# Altium PCB XBR403-01.PcbDoc
Units mil, origin at the board's own origin, x right, y up, seen from the top; angles counter-clockwise.
Board outline 1338.58 x 905.51 mil, 2 copper layers (Top Layer, Bottom Layer), stack 39.335 mil thick; 54 components, 31 nets, 143 pads, 97 vias.
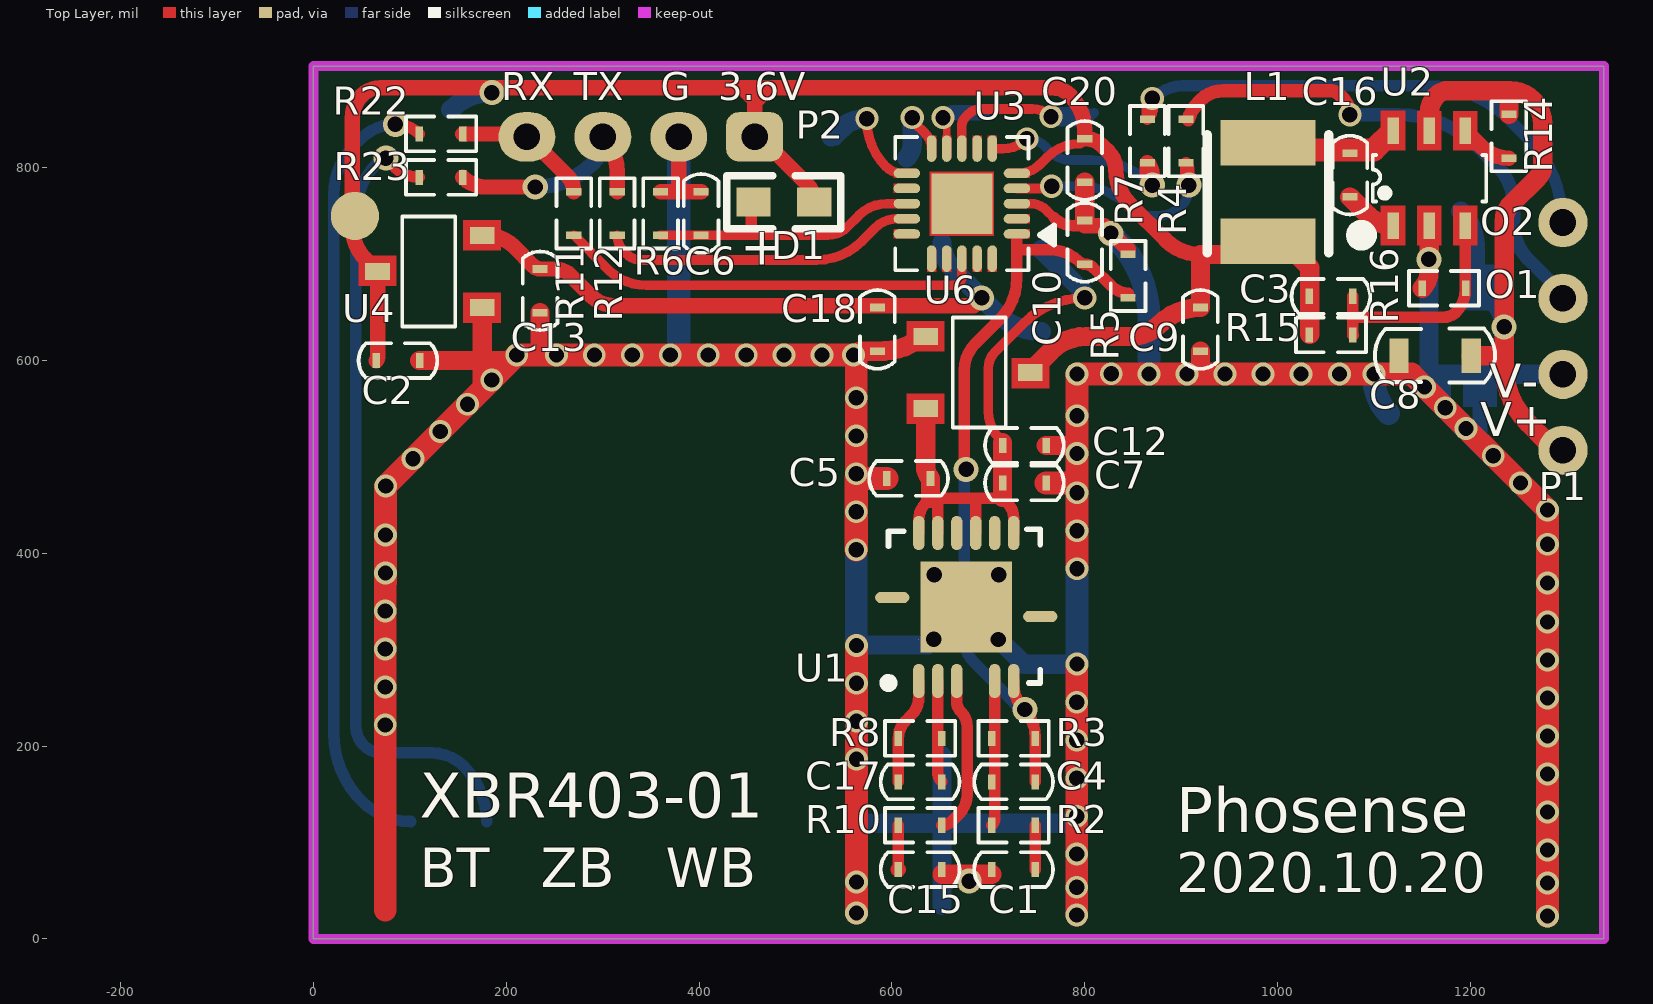
[diagram p0: Top Layer view]
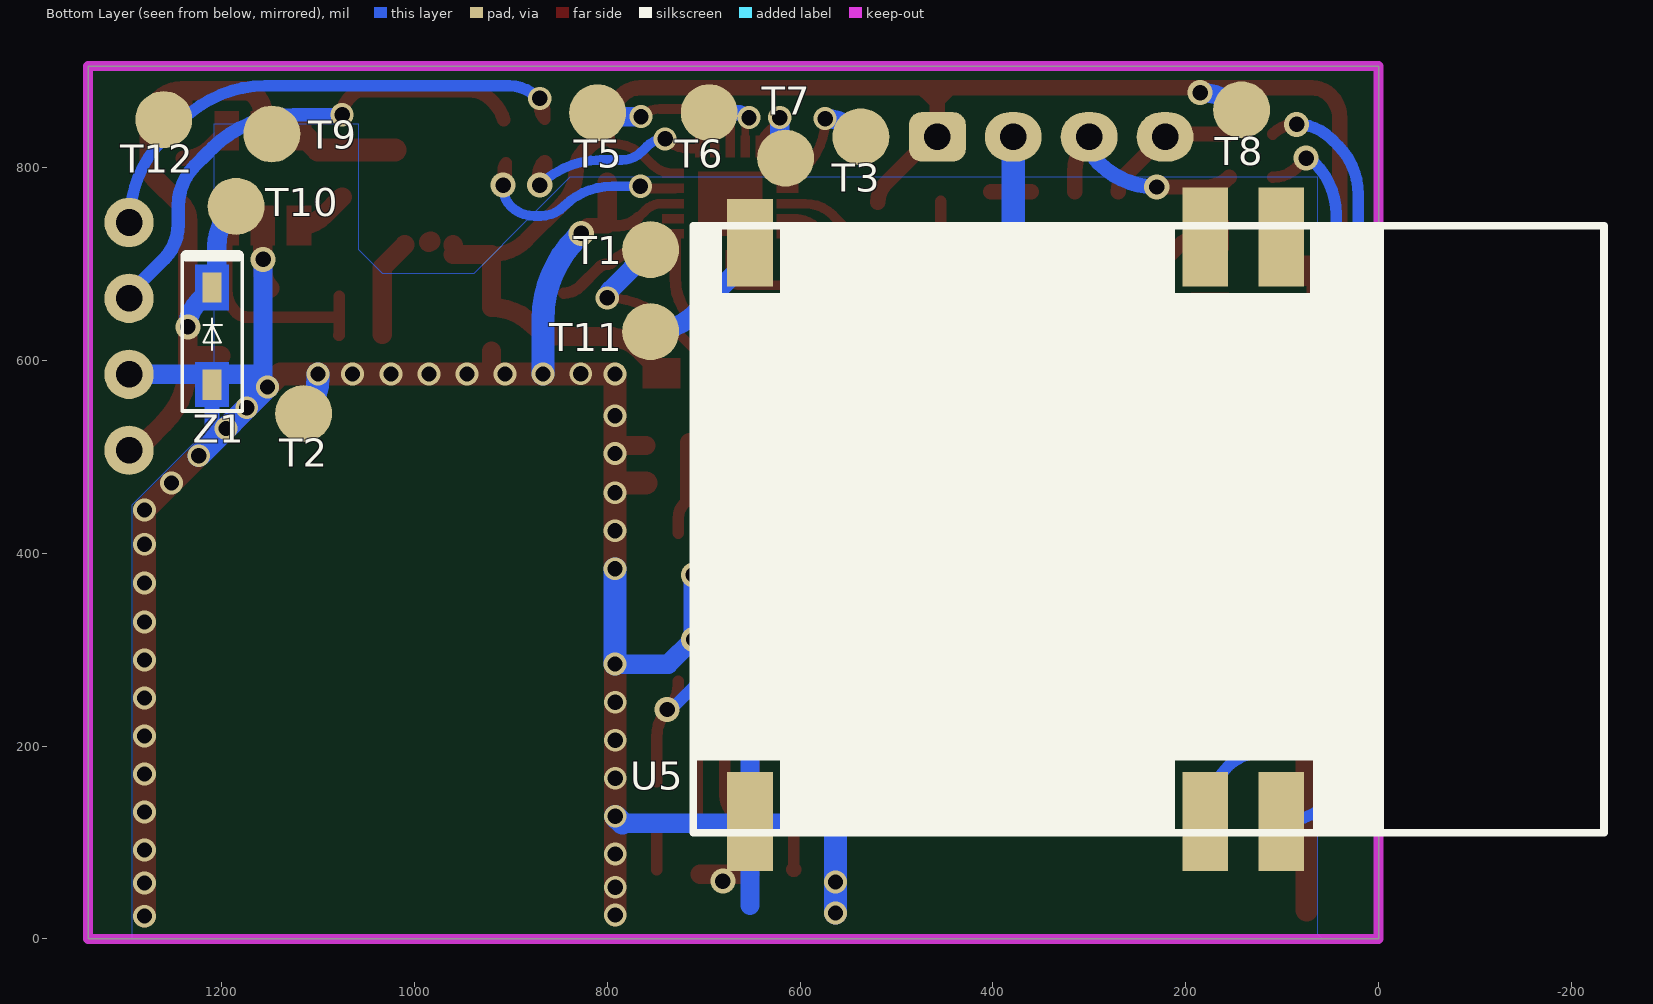
[diagram p1: Bottom Layer view, seen from below]

## Layer stack, top to bottom
Top Layer: signal copper 1.4
Dielectric: core 36.5354, FR-4, Dk 4.8
Bottom Layer: signal copper 1.4

## Board outline
0,0 1338.58,0 1338.58,905.51 0,905.51

## Design rules (kind name [scope] priority, off if disabled: settings)
Clearance [All] p0: scope1count=1 scope1_0_kind=Board scope1_0_value=Board scope2count=1 scope2_0_kind=Board scope2_0_value=Board commentlength=0 gap=10
Clearance [All] p1: gap=10
ComponentClearance [All] p0: scope1count=1 scope1_0_kind=Board scope1_0_value=Board scope2count=1 scope2_0_kind=Board scope2_0_value=Board commentlength=0 gap=10 collisioncheckmode=3
ComponentClearance [All] p1: gap=10 collisioncheckmode=3 verticalgap=10
DiffPairsRouting [All] p0: scope1count=1 scope1_0_kind=Board scope1_0_value=Board scope2count=1 scope2_0_kind=Board scope2_0_value=Board commentlength=0
FanoutControl Fanout_BGA [All] p0 off: scope1count=1 scope1_0_kind=Board scope1_0_value=Board scope2count=1 scope2_0_kind=Board scope2_0_value=Board commentlength=69 // Protel DXP Scope 1 Expression Was: IsBGA   Fanout_BGA (Default Rule)
FanoutControl Fanout_LCC [All] p0 off: scope1count=1 scope1_0_kind=Board scope1_0_value=Board scope2count=1 scope2_0_kind=Board scope2_0_value=Board commentlength=69 // Protel DXP Scope 1 Expression Was: IsLCC   Fanout_LCC (Default Rule)
FanoutControl Fanout_SOIC [All] p0 off: scope1count=1 scope1_0_kind=Board scope1_0_value=Board scope2count=1 scope2_0_kind=Board scope2_0_value=Board commentlength=71 // Protel DXP Scope 1 Expression Was: IsSOIC   Fanout_SOIC (Default Rule)
FanoutControl Fanout_Small [All] p0 off: scope1count=1 scope1_0_kind=Board scope1_0_value=Board scope2count=1 scope2_0_kind=Board scope2_0_value=Board commentlength=84 // Protel DXP Scope 1 Expression Was: (CompPinCount < 5)   Fanout_Small (Default Rule)
FanoutControl Fanout_Default [All] p0: scope1count=1 scope1_0_kind=Board scope1_0_value=Board scope2count=1 scope2_0_kind=Board scope2_0_value=Board commentlength=30 // Fanout_Default (Default Rule)
Height [All] p0: scope1count=1 scope1_0_kind=Board scope1_0_value=Board scope2count=1 scope2_0_kind=Board scope2_0_value=Board commentlength=0
HoleSize [All] p0: scope1count=1 scope1_0_kind=Board scope1_0_value=Board scope2count=1 scope2_0_kind=Board scope2_0_value=Board commentlength=0 absolutevalues=TRUE maxlimit=100 minlimit=1 maxpercent=80.000 minpercent=20.000
LayerPairs [All] p0: scope1count=1 scope1_0_kind=Board scope1_0_value=Board scope2count=1 scope2_0_kind=Board scope2_0_value=Board commentlength=0 enforce=TRUE
PasteMaskExpansion [All] p0: scope1count=1 scope1_0_kind=Board scope1_0_value=Board scope2count=1 scope2_0_kind=Board scope2_0_value=Board commentlength=0 expansion=0
PlaneClearance [All] p0: scope1count=1 scope1_0_kind=Board scope1_0_value=Board scope2count=1 scope2_0_kind=Board scope2_0_value=Board commentlength=0 clearance=20
PlaneConnect [All] p0: scope1count=1 scope1_0_kind=Board scope1_0_value=Board scope2count=1 scope2_0_kind=Board scope2_0_value=Board commentlength=0 planeconnectstyle=Relief reliefexpansion=20 reliefentries=4 reliefconductorwidth=10 reliefairgap=10
PolygonConnect [All] p0: scope1count=1 scope1_0_kind=Board scope1_0_value=Board scope2count=1 scope2_0_kind=Board scope2_0_value=Board commentlength=0 connectstyle=Direct reliefconductorwidth=10 reliefentries=4 polygonreliefangle="90 Angle"
PolygonConnect [All] p1: connectstyle=Direct reliefconductorwidth=10 reliefentries=4 polygonreliefangle="90 Angle"
RoutingCorners [All] p0: scope1count=1 scope1_0_kind=Board scope1_0_value=Board scope2count=1 scope2_0_kind=Board scope2_0_value=Board commentlength=0 cornerstyle=45-Degree minsetback=100 maxsetback=100
RoutingLayers [All] p0: scope1count=1 scope1_0_kind=Board scope1_0_value=Board scope2count=1 scope2_0_kind=Board scope2_0_value=Board commentlength=0 top layer=Automatic bottom layer=Automatic
RoutingPriority [All] p0: scope1count=1 scope1_0_kind=Board scope1_0_value=Board scope2count=1 scope2_0_kind=Board scope2_0_value=Board commentlength=0
RoutingTopology [All] p0: scope1count=1 scope1_0_kind=Board scope1_0_value=Board scope2count=1 scope2_0_kind=Board scope2_0_value=Board commentlength=0 topology=Shortest
RoutingVias [All] p0: scope1count=1 scope1_0_kind=Board scope1_0_value=Board scope2count=1 scope2_0_kind=Board scope2_0_value=Board commentlength=0 holewidth=28 width=50 viastyle="Through Hole" minholewidth=28 minwidth=50 maxholewidth=28 maxwidth=50
RoutingVias [All] p1: holewidth=28 width=50 viastyle="Through Hole" minholewidth=28 minwidth=50 maxholewidth=28 maxwidth=50
ShortCircuit [All] p0: scope1count=1 scope1_0_kind=Board scope1_0_value=Board scope2count=1 scope2_0_kind=Board scope2_0_value=Board commentlength=0 allowed=FALSE
SolderMaskExpansion [All] p0: scope1count=1 scope1_0_kind=Board scope1_0_value=Board scope2count=1 scope2_0_kind=Board scope2_0_value=Board commentlength=0 expansion=4
SolderMaskExpansion [All] p1: expansion=4
TestPointUsage [All] p0: scope1count=1 scope1_0_kind=Board scope1_0_value=Board scope2count=1 scope2_0_kind=Board scope2_0_value=Board commentlength=0 valid=0 allowmultiple=FALSE
TestPointUsage [All] p1: valid=0 allowmultiple=FALSE
Testpoint [All] p0: scope1count=1 scope1_0_kind=Board scope1_0_value=Board scope2count=1 scope2_0_kind=Board scope2_0_value=Board commentlength=0 side=3 testpointundercomponent=TRUE minsize=40 maxsize=100 preferedsize=60 minholesize=0 maxholesize=40 preferedholesize=32 testpointgrid=1 style=297 order=0123456789
Testpoint [All] p1: side=3 testpointundercomponent=TRUE minsize=40 maxsize=100 preferedsize=60 minholesize=0 maxholesize=40 preferedholesize=32 testpointgrid=1 style=297 order=0123456789
UnRoutedNet [All] p0: scope1count=1 scope1_0_kind=Board scope1_0_value=Board scope2count=1 scope2_0_kind=Board scope2_0_value=Board commentlength=0
Width [All] p0: scope1count=1 scope1_0_kind=Board scope1_0_value=Board scope2count=1 scope2_0_kind=Board scope2_0_value=Board commentlength=0 maxlimit=60 minlimit=8 preferedwidth=10
Width [All] p1: maxlimit=60 minlimit=8 preferedwidth=10 toplayer_prefwidth=8 bottomlayer_minwidth=10 minimp=50.000000 maximp=50.000000 favimp=50.000000
18 further rules are at their usual default settings.

## Components (designator, comment, footprint, x,y, rotation, side; value= is the part's Value field where it differs from the comment)
C1 "4.7uF" C0402 748.85,72.05 r180 top
C2 "10uF" C0402 65,600 r0 top
C3 "22pF" C0402 1078,666.62 r180 top
C4 "1nF" C0402 748.85,162.99 r180 top
C5 "0.5pF" C0402 639.96,477.68 r180 top
C6 "0.1uF" C0402 402,730 r90 top
C7 "0.1uF" C0402 714.76,473 r0 top
C8 "10uF/16V" C0603 1200,605 r180 top
C9 "10uF" C0402 920,655 r270 top
C10 "0.1uF" C0402 800,700 r90 top
C12 "10uF" C0402 714.76,512 r0 top
C13 "10uF" C0402 235,695 r270 top (schematic designator C5)
C15 "1nF" C0402 651.85,72.05 r180 top
C16 "0.1uF" C0402 1075,815 r270 top
C17 "1nF" C0402 651.85,162.99 r180 top
C18 "0.1uF" C0402 585,655 r270 top (schematic designator C5)
C20 "0.1uF" C0402 800,785 r90 top
D1 "PT19-21C" LED-0603 487.91,764.26 r0 top
L1 "PRS3015-100MT" PRS3015 990,830 r270 top
P1 "PH2.0-4P" PH2.0-5P#1 1296,507 r90 top
P2 "PH2.0-4P" PH2.0-5P#2 457.6,832.05 r180 top (schematic designator P1)
R2 "2k" R0402 748.85,117.99 r180 top
R3 "1M" R0402 748.85,207.99 r180 top
R4 "200" R0402 905,805 r90 top
R5 "47k" R0402 845,665 r90 top
R6 "47k" R0402 360,730 r90 top
R7 "200" R0402 865,805 r90 top (schematic designator R4)
R8 "5.1k" R0402 651.85,207.99 r180 top
R10 "5.1k" R0402 651.85,117.99 r180 top
R11 "1k" R0402 270,730 r90 top
R12 "1k" R0402 315,730 r90 top
R14 "47k" R0402 1240,810 r90 top
R15 "25.5k" R0402 1078,626.62 r180 top
R16 "5.1k" R0402 1150,675 r0 top
R22 "1k" R0402 155,835 r180 top (schematic designator R12)
R23 "1k" R0402 155,790 r180 top (schematic designator R12)
T1 "" TestPoints#1 760,710 r180 bottom
T2 "" TestPoints#1 1120,540 r180 bottom (schematic designator T1)
T3 "" TestPoints#2 542.55,835.74 r180 bottom
T5 "" TestPoints#3 810,855 r180 bottom
T6 "" TestPoints#4 695,855 r180 bottom
T7 "" TestPoints#5 625,795 r180 bottom
T8 "" TestPoints#6 145.55,863.69 r180 bottom (schematic designator T3)
T9 "" TestPoints#7 1140,835 r180 bottom (schematic designator T2)
T10 "" TestPoints#8 1185,760 r180 bottom (schematic designator T2)
T11 "" TestPoints#9 755,635 r180 bottom (schematic designator T1)
T12 "" TestPoints#8 1260,850 r180 bottom (schematic designator T2)
U1 "XBR816C" XBR816 795.2,285.28 r90 top
U2 "SY8120B1ABC" SOT-23-6 1120,740 r90 top
U3 "HC89S003F4U6" QFN20(3*3) 672.6,762.79 r180 top
U4 "ME6216A33M3G" SOT-23-L 175,655 r180 top (schematic designator U6)
U5 "BT3L" ZS3L 711,740 r270 bottom
U6 "ME6216A12M3G" SOT-23-L 635,625 r0 top
Z1 "SESD3Z15C" SOD-323 1210,575 r90 bottom

## Footprints (in the part's own frame and the unit in brackets; to place one, negate y for a bottom-side part, rotate by r counter-clockwise, add the part's x,y. Pads: shape width x height; smd on the part's side, far side on the other; paste and mask are expansions set on the pad)
C0402 [mm]
  rect 0.2x0.4 smd: 1(0,0) 2(1.15,0)
  silkscreen extent -0.46,-0.46 1.61,0.46
C0603 [mil]
  rect 19.8x35.55 smd: 1(-0.92,0) 2(74,0)
  silkscreen extent -25,-28 99,28
LED-0603 [mm]
  rect 0.9x0.762 smd: 1(-0.8,0) 2(0.8,0)
  silkscreen extent -1.5,-0.7 1.5,0.7
PH2.0-5P#1 [mm]
  round 1.3 hole 0.7: 1(0,0) 2(2,0) 3(4,0) 4(6,0)
PH2.0-5P#2 [mm]
  rrect50% 1.5x1.3 hole 0.7: 1(0,0)
  oval 1.5x1.3 hole 0.7: 2(2,0) 3(4,0) 4(6,0)
PRS3015 [mm]
  rect 1.2x2.5 smd: 1(0.1,0) 2(2.7,0)
  silkscreen extent -0.1,-1.6 3,1.6
QFN20(3*3) [mm]
  rect 1.6x1.6 smd: 0(0,0)
  oval 0.7x0.25 smd: 1(-1.45,0.8) 2(-1.45,0.4) 3(-1.45,0) 4(-1.45,-0.4) 5(-1.45,-0.8) 11(1.45,-0.8) 12(1.45,-0.4) 13(1.45,0) 14(1.45,0.4) 15(1.45,0.8)
  oval 0.25x0.7 smd: 6(-0.8,-1.45) 7(-0.4,-1.45) 8(0,-1.45) 9(0.4,-1.45) 10(0.8,-1.45) 16(0.8,1.45) 17(0.4,1.45) 18(0,1.45) 19(-0.4,1.45) 20(-0.8,1.45)
  Top Layer region: -1.8,-0.675 -1.8,-0.925 -1.219,-0.925 -1.219,-0.675
  Top Layer region: -1.8,-0.275 -1.8,-0.525 -1.219,-0.525 -1.219,-0.275
  Top Layer region: -1.8,0.125 -1.8,-0.125 -1.219,-0.125 -1.219,0.125
  Top Layer region: -1.8,0.525 -1.8,0.275 -1.219,0.275 -1.219,0.525
  Top Layer region: -1.8,0.925 -1.8,0.675 -1.219,0.675 -1.219,0.925
  Top Layer region: -0.675,1.8 -0.925,1.8 -0.925,1.219 -0.675,1.219
  Top Layer region: -0.275,1.8 -0.525,1.8 -0.525,1.219 -0.275,1.219
  Top Layer region: 0.125,1.8 -0.125,1.8 -0.125,1.219 0.125,1.219
  Top Layer region: 0.525,1.8 0.275,1.8 0.275,1.219 0.525,1.219
  Top Layer region: 0.925,1.8 0.675,1.8 0.675,1.219 0.925,1.219
  Top Layer region: 1.8,0.675 1.8,0.925 1.219,0.925 1.219,0.675
  Top Layer region: 1.8,0.275 1.8,0.525 1.219,0.525 1.219,0.275
  Top Layer region: 1.8,-0.125 1.8,0.125 1.219,0.125 1.219,-0.125
  Top Layer region: 1.8,-0.525 1.8,-0.275 1.219,-0.275 1.219,-0.525
  Top Layer region: 1.8,-0.925 1.8,-0.675 1.219,-0.675 1.219,-0.925
  Top Layer region: 0.675,-1.8 0.925,-1.8 0.925,-1.219 0.675,-1.219
  Top Layer region: 0.275,-1.8 0.525,-1.8 0.525,-1.219 0.275,-1.219
  Top Layer region: -0.125,-1.8 0.125,-1.8 0.125,-1.219 -0.125,-1.219
  Top Layer region: -0.525,-1.8 -0.275,-1.8 -0.275,-1.219 -0.525,-1.219
  Top Layer region: -0.85,-0.85 0.85,-0.85 0.85,0.85 -0.85,0.85
  Top Layer region: -0.925,-1.8 -0.675,-1.8 -0.675,-1.219 -0.925,-1.219
  silkscreen extent -2.43,-1.76 1.76,1.76
R0402 [mm]
  rect 0.2x0.4 smd: 1(0,0) 2(1.15,0)
  silkscreen extent -0.35,-0.46 1.5,0.46
SOD-323 [mm]
  rect 0.8x0.5 smd: A(0,0) K(2.56,0)
  Top Layer region: -0.594,0.451 0.601,0.451 0.601,-0.452 -0.594,-0.452
  Top Layer region: 1.958,0.451 3.161,0.451 3.161,-0.452 1.958,-0.452
  silkscreen extent -0.69,-0.8 3.4,0.78
SOT-23-6 [mm]
  rect 0.7x0.3 smd: 1(0,0) 2(0,-0.95) 3(0,-1.9) 4(2.5,-1.9) 5(2.5,-0.95) 6(2.5,0)
  Top Layer region: -0.526,-0.322 0.527,-0.322 0.527,0.331 -0.526,0.331
  Top Layer region: -0.527,-1.276 0.526,-1.276 0.526,-0.623 -0.527,-0.623
  Top Layer region: -0.527,-2.226 0.526,-2.226 0.526,-1.573 -0.527,-1.573
  Top Layer region: 1.973,-0.322 3.026,-0.322 3.026,0.331 1.973,0.331
  Top Layer region: 1.972,-1.276 3.025,-1.276 3.025,-0.623 1.972,-0.623
  Top Layer region: 1.972,-2.226 3.025,-2.226 3.025,-1.573 1.972,-1.573
  silkscreen extent 0.63,-2.45 1.86,0.54
SOT-23-L [mm]
  rect 0.65x0.45 smd: 1(0,0) 2(0,-1.9) 3(2.757,-0.95)
  Top Layer region: 2.256,-1.366 3.259,-1.366 3.259,-0.563 2.256,-0.563
  Top Layer region: -0.501,-2.306 0.502,-2.306 0.502,-1.503 -0.501,-1.503
  Top Layer region: -0.501,-0.401 0.502,-0.401 0.502,0.402 -0.501,0.402
  silkscreen extent 0.71,-2.4 2.11,0.5
TestPoints#1 [mil] "TestPoints"
  round 59.06 smd: 1(5,5)
TestPoints#2 [mil] "TestPoints"
  round 59.06 smd: 1(5.55,-3.69)
TestPoints#3 [mil] "TestPoints"
  round 59.06 smd: 1(0,2.05)
TestPoints#4 [mil] "TestPoints"
  round 59.06 smd: 1(0.79,2.05)
TestPoints#5 [mil] "TestPoints"
  round 59.06 smd: 1(10,15)
TestPoints#6 [mil] "TestPoints"
  round 59.06 smd: 1(3.55,-3.69)
TestPoints#7 [mil] "TestPoints"
  round 59.06 smd: 1(-7.95,0)
TestPoints#8 [mil] "TestPoints"
  round 59.06 smd: 1(0,0)
TestPoints#9 [mil] "TestPoints"
  round 59.06 smd: 1(0,-5)
XBR816 [mm] "QFN24"
  oval 0.9x0.3 smd: 1(-0.45,4.25) 2(-0.45,3.75) 3(-0.45,3.25) 5(-0.45,2.25) 6(-0.45,1.75) 13(3.45,1.75) 14(3.45,2.25) 15(3.45,2.75) 16(3.45,3.25) 17(3.45,3.75) 18(3.45,4.25)
  oval 0.3x0.9 smd: 10(1.25,1.05) 21(1.75,4.95)
  rect 2.4x2.4 smd: 25(1.5,3)
  silkscreen extent -0.61,1.05 3.55,5.16
ZS3L [mm]
  rect 2.6x1.2 smd: 1(0.3,15.5) 2(0.3,13.5) 9(15.7,1.5) 15(15.7,13.5) 16(15.7,15.5)
  rect 2.295x1.2 smd: 8(0.452,1.5)
  silkscreen extent 0,0 16,24

## Part data
C1 C2 C3 C4 C5 C6 C7 C8 C9 C10 C12 C13 C15 C16 C17 C18 C20: library part Cap, "Capacitor"
D1: library part "Photo Sen", "Photosensitive Diode"
L1: library part Inductor, "Inductor"
P1 P2: library part CON5, "Connector"
R2 R3 R4 R5 R6 R7 R8 R10 R11 R12 R14 R15 R16 R22 R23: library part Res2, "Resistor"
T1 T2 T3 T5 T6 T7 T8 T9 T10 T11 T12: library part TestPoints, "TestPoints"
U1: library part XBR1000_24_1
U2: library part H9108
U3: library part HC89S003F4, "MCU"
U4 U6: library part SSP6206
Z1: library part "D Zener", "Zener Diode"

## Free pads (board coordinates)
  round 50 smd: 0(43,750)

## Via types
v1: diameter 23.62, hole 15.75, Top Layer to Bottom Layer, tented both sides, 71 vias
v2: diameter 26, hole 16, Top Layer to Bottom Layer, tented both sides, 17 vias
v3: diameter 24, hole 16, Top Layer to Bottom Layer, tented both sides, 9 vias

## Nets (pads, with @x,y where several pads share a name; then routed paths per layer and width w, separated by ;. In a path a pad name is that pad's centre, name@x,y a point inside that pad or via, vN(x,y) a via of type N, cw(c..) or ccw(c..) an arc to the next point about the centre after c; other vN are vias at no path point)
1.2V: C5.1 C7.1 C12.1 T1.1 U1.13 U1.15 U1.17 U1.18 U6.2 | length 655.6
  Top Layer w10: C12.1 ccw(c705.27,512) 711.98,518.72 cw(c740.91,547.64) 700,547.64 700,592.1 cw(c723.9,592.1) 707,609 736.84,638.84 cw(c800,575.67) v3(800,665)
  Top Layer w12: U1.18 627.87,434.94 cw(c652.07,434.94) 634.96,452.05 636.43,453.51 cw(c644.96,444.98) 644.96,457.05 709.96,457.05 cw(c709.96,444.98) 718.5,453.51 719.96,452.05 cw(c704.66,436.74) 726.3,436.74 U1.13 ; U1.17 647.56,454.45 ; U1.15 686.93,455.08
  Top Layer w20: U6.2 635,489.65 ccw(c651.94,489.65) C5.1 639.96,457.05 ; 714.76,458.05 C12.1@714.76,515
  Bottom Layer w20: T1.1 796.46,673.54 cw(c787.93,665) v3(800,665)
3.3V: C13.1 C18.1 T11.1 U4.2 U5.8 | length 686.9
  Top Layer w16: U4.2@180,729.8 cw(c180,690.46) 207.82,718.28 228.34,697.76 ccw(c235,704.42) C13.1 248.86,695 ; 250,695 cw(c250,670.86) 267.07,687.93 287.93,667.07 ccw(c312.24,691.38) 312.24,657 685,657 v2(693,665)
  Bottom Layer w20: U5.8 ccw(c690.9,722.19) 663.35,694.65 708.91,649.09 ccw(c755,695.18) T11.1
3.6V: C2.1 C3.2 C9.1 C20.2 D1.2 L1.2 P2.1 pad.0 R15.2 T8.1 U3.5 U4.3 U6.3 | length 1976.1
  Top Layer w10: U3.5 732.07,794.28 ccw(c732.07,823.32) 752.6,802.79 ccw(c752.6,803.24) 752.92,802.92 760.86,810.86 cw(c795,776.72) 795,825
  Top Layer w16: C2.1 ccw(c61.48,603.52) 66.46,603.52 U4.3 54.95,703.91 cw(c91.04,740) 40,740 40,850.86 cw(c74.14,850.86) 50,875 cw(c69.31,855.69) 69.31,883 765.69,883 cw(c765.69,855.69) 785,875 cw(c748.79,838.79) 800,838.79 C20.2 cw(c800,804.38) 818.31,822.69 824.93,816.07 cw(c807.86,799) 832,799 ccw(c885.11,799) 847.56,761.44 884.15,724.85 ccw(c920,760.7) 920,710 ; 445,883 457.6,870.4 ; 452.76,883 cw(c452.76,872.76) 460,880 ccw(c465.8,874.2) 457.6,874.2 P2.1 cw(c457.6,819.12) 466.74,828.26 511.4,783.6 cw(c492.05,764.26) D1.2 D1.2@519.41,765.21 ; 457.6,867.6 470,880 ; P2.1@470,836.21 P2.1@470,845
  Top Layer w20: L1.2@959.72,710 920,710 C9.1 ccw(c920,594.64) 877.32,637.32 cw(c847.57,667.07) 847.57,625 801.21,625 ccw(c801.21,573.79) 765,610 U6.3@744.21,589.21 ; L1.2@959.72,719.33 cw(c960.67,719.33) L1.2@960,720 ; L1.2@982.91,723.7 cw(c982.91,720.56) L1.2@985.13,722.78 ; L1.2@1010,720 1033.49,696.51 R15.2@1033.49,627.02 ; U6.3@744.21,589.21 ccw(c745.82,587.6) U6.3 cw(c745.82,587.6) U6.3@744.21,589.21
  Bottom Layer w20: T8.1@142.32,860.32 cw(c185,817.64) v2(185,878)
5-15V: C8.1 P1.1 R14.2 T10.1 U2.5 Z1.K | length 735.9
  Top Layer w20: U2.5 1157.39,856.64 cw(c1183.36,856.64) 1165,875 cw(c1177.07,862.93) 1177.07,880 1240.86,880 cw(c1240.86,845.86) 1265,870 cw(c1240.86,845.86) 1275,845.86 ; C8.1 1235,605 ; R14.2 1240,875 ; 1275,845 1275,802.07 cw(c1257.93,802.07) 1270,790 1242.07,762.07 ccw(c1259.14,745) 1235,745 1235,595.36 ccw(c1320.36,595.36) 1260,535 1277.93,517.07 ccw(c1295,534.14) P1.1@1295,510
  Bottom Layer w20: T10.1@1190,755 cw(c1153.79,718.79) 1205,718.79 1205,675.79 cw(c1205,665.62) 1212.19,672.81 1224.39,660.61 cw(c1198.79,635) v2(1235,635)
GND: C1.2 C2.2 C5.2 C6.2 C7.2 C8.2 C9.2 C10.2 C12.2 C13.2 C15.1 C18.2 C20.1 P1.2 P2.2 R5.2 R6.2 R16.1 T2.1 U1.25 U2.2 U3.3 U4.1 U5.9 U6.1 Z1.A | length 5755.6
  Top Layer w10: U3.3 743.54,762.79 cw(c743.54,738.73) 760.55,755.74 768.15,748.15 ; C10.2@798.88,745.74 cw(c798.88,744.15) C10.2
  Top Layer w12: 768.15,748.15 ccw(c787.81,767.81) 787.81,740 800,740
  Top Layer w16: R6.2 C6.2 ; P2.2 378.86,778.03 ccw(c382.76,778.03) 380,775.28 ; v1@787.12,512 cw(c787.12,505.17) v1@791.94,510 ; 800,740 820.28,740 845,715.28
  Top Layer w20: C2.2 204.79,600 ccw(c204.79,600.5) 205.14,600.14 v1(210.83,605.83) ; v1@175,575 U4.1 ; 235,615.83 C13.2 ; v1(560,605.83) cw(c569.41,596.42) 569.41,609.72 C18.2@592.2,609.72 ; C18.2@592.2,610.2 ccw(c592.2,665.73) U6.1@631.46,626.46 ; C15.1@651.85,67.05 C1.2@703.57,67.05 ; v2(680,60) v2@680,67.05 ; C12.2 v1@787.12,512 ; C10.2 C20.1 ; 854.68,586.81 ccw(c855.63,586.81) v1@854.96,586.14 ; 920,586.14 C9.2 ; R16.1 ccw(c1133.1,691.9) 1157,691.9 v2(1157,705) ccw(c1156.03,705.97) 1157.4,705.97 U2.2 ; v1@1174.58,550.42 ccw(c1173.58,551.42) v1@1175,551.42
  Top Layer w23.62: 74.37,30 v1@74.37,369.61 ; v1@74.72,369.61 74.72,469.72 v1(210.83,605.83) 562.97,605.83 v1@562.97,477.68 ; v1(563.28,27.05) v1(563.28,304.57) ; v1(791.63,25) v1@791.63,284.88 ; v1(791.94,384.09) v1(791.94,462.83) ; v1@791.94,464.09 v1(791.94,586.14) 1138.86,586.14 v1(1280.13,444.87) v1(1280.13,23.7)
  Top Layer w24: v1(562.97,403.78) 562.97,477.68 C5.2 ; C7.2 v1@791.94,473
  Bottom Layer w10: v1(827.56,586.32) ccw(c821.66,592.22) v1@830,592.22
  Bottom Layer w16: 1210,520 Z1.A
  Bottom Layer w20: v1@562.97,304.88 637.32,304.88 643.74,311.3 v2(643.74,377.99) ; 563.28,120 v1@784.23,120 ; 651.94,34.7 651.94,190 ; v2(710.75,377.68) 710.75,310.98 736.85,284.88 v1@791.63,284.88 ; v1(1152.41,572.59) ccw(c1141.32,583.68) 1157,583.68 v2(1157,705) ; 1157,585.74 P1.2 ; 1170,585.74 1170,560.59 ccw(c1183.49,560.59) v1(1173.95,551.05)
  Bottom Layer w23.5: v1(1152.41,572.59) v1(1223.68,501.32)
  Bottom Layer w23.62: v1@562.97,304.88 v1(562.97,403.78) ; v1(563.28,27.05) v1(563.28,304.57) ; v1@784.23,120 v1(791.63,127.4) ; v1(791.94,285.2) v1(791.94,384.09) ; v2@831.39,727.61 cw(c746.03,642.26) 866.74,642.26 v1(866.74,586.13) ; v1(1100,586.14) 1100,581.21 ccw(c1151.21,581.21) T2.1
  Bottom Layer w24: 378.86,620 P2.2
  other v1: 791.63,53.66 1280.13,58.07 563.28,59.06 791.63,88.03 1280.13,92.44 1280.13,131.81 791.63,166.77 1280.13,171.18 563.28,186.46 791.63,206.14 1280.13,210.55 74.37,222.13 563.28,225.83 791.63,245.51 1280.13,249.92 74.37,261.5 563.28,265.2 1280.13,289.37 74.37,300.87 1280.13,328.74 74.37,340.24 1280.13,369.37 74.72,379.61 1280.13,409.37 74.72,418.98 791.94,423.46 562.97,443.15 75,470 1251.91,473.09 562.97,482.52 103.23,498.23 791.94,503.46 562.97,521.89 131.46,526.46 1195.45,529.55 791.94,542.83 159.68,554.68 562.97,561.42 184.9,579.9 906.11,586.14 945.48,586.14 984.85,586.14 1024.33,586.14 1064.33,586.14 251.95,605.83 291.32,605.83 330.69,605.83 370.06,605.83 409.43,605.83 448.8,605.83 488.17,605.83 527.54,605.83
  other v2: 643.43,310.98 710.43,310.67 827,732
LIGHT_CHECK: C6.1 D1.1 R6.1 U3.13 | length 301.4
  Top Layer w10: R6.1 533.49,730 ccw(c533.49,757.79) 553.14,738.14 565.66,750.66 cw(c594.93,721.4) 594.93,762.79 U3.13 ; 452.91,730 ccw(c450.16,732.76) 454.06,732.76
  Top Layer w12: 454.06,732.76 D1.1@454.06,765
MCU_RXD: R11.1 U3.18 | length 445.3
  Top Layer w10: R11.1 305.66,694.34 ccw(c345.11,733.8) 345.11,678 634.83,678 662.76,678 ccw(c662.76,688.24) 670,681 ccw(c663.73,687.27) 672.6,687.27 U3.18
NetC1_1: C1.1 R2.1 | length 45.9
  Top Layer w12: C1.1 R2.1
NetC3_1: C3.1 R15.1 R16.2 U2.3 | length 239
  Top Layer w12: 1078,645 1172.93,645 ccw(c1172.93,662.07) 1185,650 ccw(c1161.34,673.66) 1194.8,673.66 1194.8,688.9 ; C3.1 R15.1 ccw(c1078.67,627.29) R15.1@1078.67,626.35 ; 1194.79,691.56 U2.3
NetC4_1: C4.1 C10.1 R3.1 R5.1 U1.6 U3.1 | length 788.5
  Top Layer w10: U3.1 U3.1@737.15,731.29
  Top Layer w12: v2@674.96,487.05 v2@674.96,487.83 ; U1.6 726.3,263.79 ccw(c762.7,263.79) 736.96,238.05 cw(c708.26,209.34) 748.85,209.34 C4.1 ; U3.1@729.68,730 729.68,685.7 cw(c669.3,685.7) 712,643 686.31,617.31 ccw(c713.63,590) 675,590 675,492.31 ccw(c682.31,492.31) v2@676.92,487.37 ; 735,715 763.79,715 cw(c763.79,670.99) 794.9,702.11 ccw(c800,707.21) C10.1 cw(c800,687.93) 808.54,696.46 827.93,677.07 ccw(c845,694.14) 845,670 ; v2@676.92,487.37 cw(c681.63,487.05) 678.26,490.35 ccw(c681.08,487.6) 677.14,487.6 v2@677.14,487.14 ; v2@676.92,487.37 ccw(c681.63,487.05) v2(676.91,487.05) ccw(c676.91,487.37) v2@677.14,487.14 ; v2@676.92,487.37 ccw(c682.31,492.31) v2@677.14,487.14
  Bottom Layer w12: v2@674.96,487.05 674.96,312.05 ccw(c711.17,312.05) 685.57,286.44 731.13,240.88 ccw(c737.96,247.7) v2(737.96,238.05)
NetC4_2: C4.2 R2.2 R3.2 U1.5 | length 150.4
  Top Layer w12: R2.2 ccw(c696.24,125.33) 706.61,125.33 U1.5
NetC15_2: C15.2 R10.2 | length 45.9
  Top Layer w12: C15.2 R10.2
NetC16_1: C16.1 L1.1 U2.6 | length 108
  Top Layer w24: L1.1@1020.32,818.43 1100,818.43 U2.6
NetC16_2: C16.2 U2.1 | length 55.7
  Top Layer w20: C16.2 1093.92,750.8 ccw(c1120,776.88) U2.1
NetC17_1: C17.1 R8.1 U1.2 | length 105.7
  Top Layer w12: U1.2 647.56,173.35 ccw(c662.21,173.35) C17.1
NetC17_2: C17.2 R8.2 U1.1 | length 111.1
  Top Layer w12: C17.2 R8.2 cw(c632.33,207.99) 614.12,226.21 619.96,232.05 ccw(c600.86,251.15) 627.87,251.15 U1.1
NetP1_3: P1.3 R4.2 T9.1 | length 535.9
  Top Layer w14: R4.2@907.2,849.58 cw(c952.62,835.28) 918.95,868.95 ; 920.19,870.19 cw(c943.87,846.51) 943.87,880 1052.93,880 cw(c1052.93,862.93) 1065,875 1067.93,872.07 cw(c1050.86,855) v3(1075,855)
  Bottom Layer w14: v3(1075,855) 1125,855 cw(c1125,734.29) 1210.36,819.64 1215.25,814.75 1227.32,802.68 cw(c1184.64,760) 1245,760 1245,741.21 ccw(c1296.21,741.21) 1260,705 1293.22,671.78 cw(c1288.92,667.48) 1295,667.48 cw(c1295,685.54) P1.3@1282.23,672.77
NetP1_4: P1.4 R7.2 T12.1 | length 550.4
  Top Layer w12: R7.2 ccw(c852.93,862.35) 870,862.35 v3(870,872) ccw(c882.07,859.93) 865,859.93 R7.2
  Bottom Layer w12: v3(870,872) ccw(c870,876.83) 873.41,873.41 cw(c901.38,845.44) 901.38,885 1155,885 cw(c1155,764.29) 1240.36,849.64 1260.51,829.49 cw(c1177.24,746.22) P1.4@1295,746.22
NetP2_3: P2.3 R12.2 R23.1 | length 232.6
  Top Layer w16: R23.1 ccw(c179.14,814.14) 179.14,780 209.14,780 v2(230,780) ; P2.3 cw(c264.19,796.12) 315,796.12 R12.2
  Bottom Layer w16: v2(230,780) ccw(c230,864.5) 289.75,804.75 ccw(c264.71,829.78) P2.3@300.12,829.78
NetP2_4: P2.4 R11.2 R22.1 | length 160.8
  Top Layer w16: R22.1 214.25,835 cw(c214.25,824.92) P2.4 ; P2.4@214.65,824.26 ccw(c214.65,833.78) P2.4@221.38,827.05 ; P2.4@220.26,834.74 cw(c217.58,832.05) P2.4 ; P2.4@223.8,826.2 cw(c229.65,832.05) P2.4 ; R11.2 ccw(c246.52,775.28) 263.12,791.88 224.07,830.93 ccw(c221.38,828.25) P2.4
NetR4_1: R4.1 U3.4 | length 261.6
  Top Layer w10: U3.4 760.23,778.54 ccw(c760.23,786.06) v3(765.55,780.74)
  Top Layer w12: R4.1 cw(c897.76,797.76) 908,797.76 ; R4.1 cw(c897.76,797.76) 908,797.76 ; R4.1 905,789.24 ccw(c915.24,789.24) v2(908,782) 908,797.76
  Bottom Layer w10: v3(765.55,780.74) 794.93,780.74 cw(c794.93,709.93) 845,760 ccw(c869.14,784.14) 869.14,750 875.86,750 ccw(c875.86,784.14) 900,760 ccw(c880.69,779.31) 908,779.31 v2(908,782)
NetR7_1: R7.1 U3.6 | length 231
  Top Layer w10: U3.6 715.55,819.87 ccw(c715.55,854.45) v3(740,830)
  Top Layer w16: 865,794.07 ccw(c882.07,794.07) v2(870,782) 870,792.93 ccw(c852.93,792.93) R7.1 865,794.07
  Bottom Layer w10: v3(740,830) cw(c740,803.44) 758.78,822.22 764.51,816.49 ccw(c785,836.97) 785,808 807.23,808 cw(c807.23,719.23) v2(870,782)
NetR10_1: R10.1 U1.3 | length 165
  Top Layer w12: R10.1 ccw(c651.85,132.61) 662.19,122.27 669.96,130.05 ccw(c650.65,149.36) 677.96,149.36 677.96,220.56 ccw(c657.48,220.56) 671.96,235.05 cw(c683.35,246.43) 667.24,246.43 U1.3
NetR12_1: R12.1 U3.14 | length 328.5
  Top Layer w10: R12.1 ccw(c339,730) 322.03,713.03 324.29,710.77 ccw(c340,726.47) 340,704.26 522,704.26 ccw(c522,770.07) 568.54,723.54 582.87,737.87 cw(c605,715.75) 605,747.04 U3.14
NetR14_1: R14.1 U2.4 | length 55.2
  Top Layer w16: U2.4 1211.34,821.87 ccw(c1240,850.53) R14.1
NetR22_2: R22.2 U5.16 | length 827.1
  Top Layer w12: v2(85,845) 85.58,845 cw(c85.58,810.86) R22.2
  Bottom Layer w12: v2(85,845) ccw(c85,794.3) 49.15,830.15 42,823 ccw(c92.7,772.3) 21,772.3 21,213.21 ccw(c120.5,213.21) 50.14,142.86 ccw(c100.76,193.48) U5.16
NetR23_2: R23.2 U5.15 | length 827.1
  Top Layer w12: v2(75,810) 84.59,800.41 ccw(c109.72,825.55) R23.2
  Bottom Layer w12: v2@66.22,805.22 ccw(c119.87,751.57) 44,751.57 44,220.31 ccw(c71.31,220.31) 52,201 ccw(c71.31,220.31) 71.31,193 122.57,193 cw(c122.57,146.09) 155.74,179.26 cw(c98.37,121.89) U5.15
NetT3_1: T3.1 U3.11 | length 146.8
  Top Layer w10: v3@574,849.15 ccw(c641.95,849.15) 593.9,801.1 ccw(c610.35,817.55) 610.35,794.28 U3.11 ; v3(574,851) v3@579.98,851.02
  Bottom Layer w10: T3.1@542.55,828 T3.1@557.46,842.9
  Bottom Layer w20: T3.1 543.19,838.24 cw(c574,807.43) v3(574,851)
NetT5_1: T5.1 U3.8 | length 173.3
  Top Layer w10: U3.8 672.6,843.79 cw(c684.21,843.79) 676,852 680.05,856.05 cw(c692,844.1) 692,861 745.69,861 cw(c745.69,833.69) v3(765,853)
  Bottom Layer w10: T5.1@800.23,853 ccw(c800.23,866.82) T5.1
  Bottom Layer w20: v3(765,853) T5.1@800.23,853
NetT6_1: T6.1 U3.9 | length 75.7
  Top Layer w8: v3(653,852) cw(c643.7,842.7) 656.85,842.7 U3.9
  Bottom Layer w16: v3(653,852) cw(c665.18,839.82) 665.18,857.05 T6.1
NetT7_1: T7.1 U3.10 | length 88.5
  Top Layer w10: U3.10 ccw(c619.32,819.87) 634.72,835.28 v3@623.12,846.88 ; v3@623.12,846.88 cw(c628.24,852) v3(621,852) ccw(c628.24,852) v3@623.12,846.88
  Bottom Layer w20: T7.1 ccw(c600.51,824.49) 621,824.49 v3(621,852)
pads on no net: U1.10 U1.14 U1.16 U1.21 U3.0 U3.2 U3.7 U3.12 U3.15 U3.16 U3.17 U3.19 U3.20 U5.1 U5.2
copper on no net: | length 3.8
  Top Layer w8: 704.09,703.8 704.09,705.7
  Top Layer w10: 704.09,703.8 704.09,705.7

## Polygon pours and split planes (outlines as drawn)
GND on Bottom Layer "Bottom Layer-No Net" (solid, remove dead copper, pour order 1000): 58,0 63,5 63,790 838.71,790 879.19,749.53 938.71,690 1033,690 1058,715 1058,845 1208,845 1208,715 1208,535 1258,485 1293,450 1293,445 1293,0 58,0

## Keep-outs
Keep-Out Layer:
  the board outline again, w10

## Silkscreen, mask and mechanical layers (free items; w line width, h text height)
Top Overlay:
  circle w16: c1087,730 r8
  text "RX" at 195,860 h50
  text "TX" at 270,860 h50
  text "G" at 360,860 h50
  text "3.6V" at 420,860 h50
  text "O2" at 1210,720 h50
  text "O1" at 1215,655 h50
  text "V-" at 1220,550 h60
  text "V+" at 1210,510 h60
  text "XBR403-01" at 110,110 h80
  text "Phosense" at 895,95 h80
  text "BT   ZB   WB" at 110,40 h70
  text "2020.10.20" at 895,35 h70
Bottom Overlay:
  rectangle: 0,670 70.91,740
  rectangle: 0,185 713,670
  rectangle: 210.91,110.08 620.91,200
  rectangle: 210.91,605 620.91,740
  rectangle: 0,110.08 68,185
  rectangle: 680.91,665 713,740

## Text inside footprints (layer, text, board x,y; h text height)
D1: Top Overlay "+" at 442.91,699.26 h39.37